# EAGLE board tiny-usb-panel (EAGLE 6.5.0)
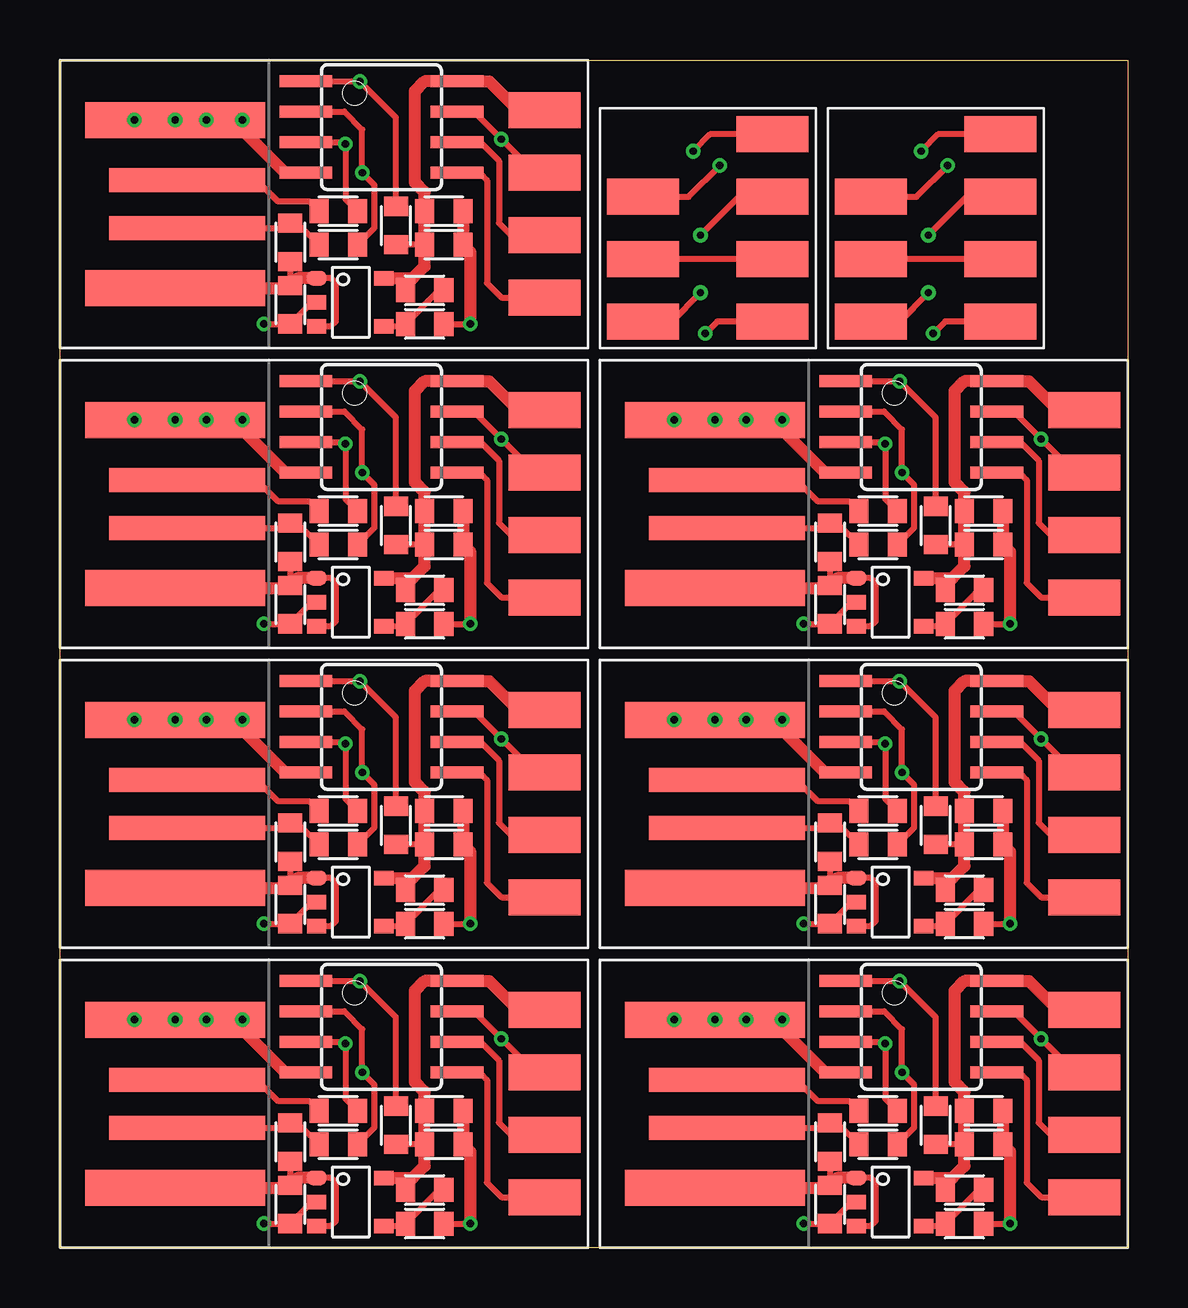
[diagram p0: board, top side]
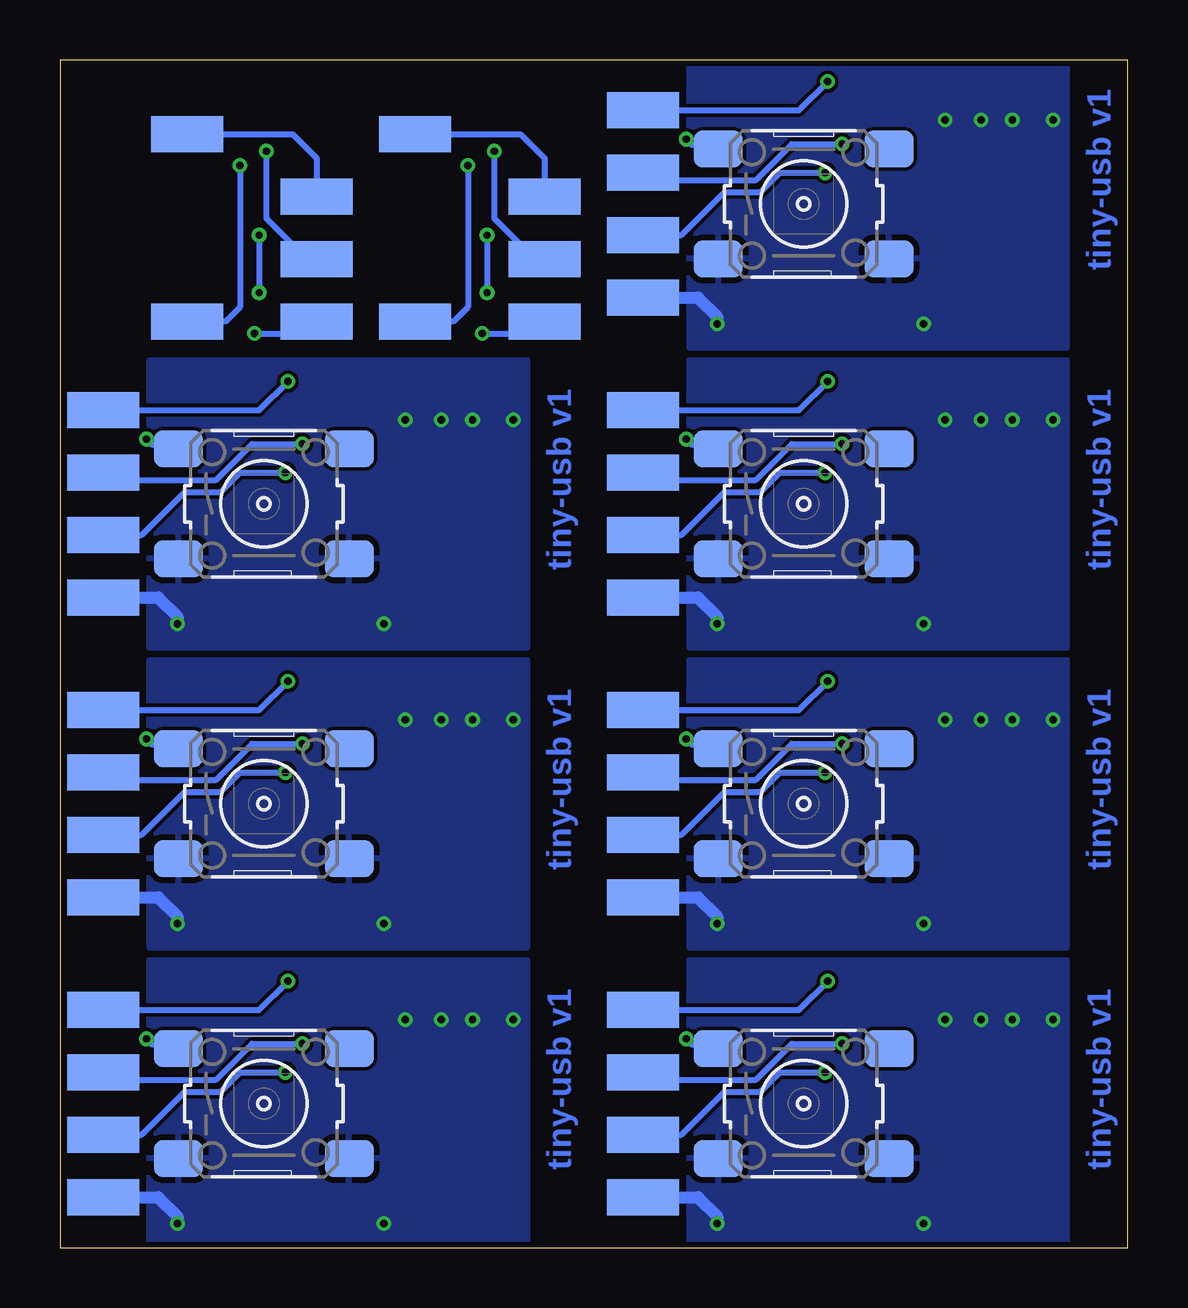
[diagram p1: board, bottom side, seen from below]

Size 44.5 x 49.5 mm. Coordinates in mm from the lower left corner, seen from the top.
Outline: 0,0 0,49.5 44.5,49.5 44.5,0 0,0
Copper layers (1*16): Top 0.035mm / dielectric 1.5mm / Bottom 0.035mm
Design rules "SeeedStudio_DRU-2layer_no_angle_20130527": minimum track width 6mil, minimum drill 12mil, track to track 6mil, track to pad 6mil, pad to pad 6mil, via to via 6mil, smd to smd 0mil, copper to edge 10mil, drill to drill 10mil, minimum pad ring 10mil, minimum via ring 6mil, stop-mask expansion 2mil, vias tented up to drill 25mil, thermal gap 10mil

## Footprints (pad centres in the part's own frame; a part is rotated, then mirrored left to right if it is on the bottom)
PAD_Q1.5X3MM = smd 3 x 1.5: 1 0,0
0603MIL = smd 0.8 x 1: 1 -0.8,0; 2 0.8,0
SOIC8 = smd 0.5 x 2.2: 1 -1.905,-3.154; 2 -0.645,-3.154; 3 0.625,-3.154; 4 1.895,-3.154; 5 1.905,3.154; 6 0.635,3.154; 7 -0.635,3.154; 8 -1.905,3.154
SOT23-5 = smd 0.8 x 0.6: 1 -1.4,1; 2 -1.4,0; 3 -1.4,-1; 4 1.4,-1; 5 1.4,1
B3F-10SMD = smd 2.032 x 1.524: 1 -3.556,2.286; 2 3.556,2.286; 3 -3.556,-2.286; 4 3.556,-2.286
USB-A-PCB = smd 7.5 x 1.5: 5V -0.2,-3.5; GND -0.2,3.5 | smd 6.5 x 1: USB_M 0.3,-1; USB_P 0.3,1

## Placement (x,y rotation side)
!RSTI_1  TP_Q3X1.5MM  [PAD_Q1.5X3MM]  33.8,43.8 180 top
!RSTI_5  TP_Q3X1.5MM  [PAD_Q1.5X3MM]  24.3,43.8 180 top
!RSTO  TP_Q3X1.5MM  [PAD_Q1.5X3MM]  29.7,38.6 180 bottom
!RSTO1  TP_Q3X1.5MM  [PAD_Q1.5X3MM]  39.2,38.6 180 bottom
C1  1u  [0603MIL]  16,4.3 0 top
C2  100n  [0603MIL]  16,5.7 0 top
C3  1u  [0603MIL]  9.6,1.8 270 top
C4  1u  [0603MIL]  16,16.8 0 top
C5  100n  [0603MIL]  16,18.2 0 top
C6  1u  [0603MIL]  9.6,14.3 270 top
C7  1u  [0603MIL]  16,29.3 0 top
C8  100n  [0603MIL]  16,30.7 0 top
C9  1u  [0603MIL]  9.6,26.8 270 top
C10  1u  [0603MIL]  16,41.8 0 top
C11  100n  [0603MIL]  16,43.2 0 top
C12  1u  [0603MIL]  9.6,39.3 270 top
C13  1u  [0603MIL]  38.5,4.3 0 top
C14  100n  [0603MIL]  38.5,5.7 0 top
C15  1u  [0603MIL]  32.1,1.8 270 top
C16  1u  [0603MIL]  38.5,16.8 0 top
C17  100n  [0603MIL]  38.5,18.2 0 top
C18  1u  [0603MIL]  32.1,14.3 270 top
C19  1u  [0603MIL]  38.5,29.3 0 top
C20  100n  [0603MIL]  38.5,30.7 0 top
C21  1u  [0603MIL]  32.1,26.8 270 top
GND  TP_Q3X1.5MM  [PAD_Q1.5X3MM]  20.2,2.1 0 bottom
GND1  TP_Q3X1.5MM  [PAD_Q1.5X3MM]  20.2,14.6 0 bottom
GND2  TP_Q3X1.5MM  [PAD_Q1.5X3MM]  20.2,27.1 0 bottom
GND3  TP_Q3X1.5MM  [PAD_Q1.5X3MM]  20.2,39.6 0 bottom
GND4  TP_Q3X1.5MM  [PAD_Q1.5X3MM]  42.7,2.1 0 bottom
GND5  TP_Q3X1.5MM  [PAD_Q1.5X3MM]  42.7,14.6 0 bottom
GND6  TP_Q3X1.5MM  [PAD_Q1.5X3MM]  42.7,27.1 0 bottom
GNDI_1  TP_Q3X1.5MM  [PAD_Q1.5X3MM]  33.8,43.8 180 bottom
GNDI_6  TP_Q3X1.5MM  [PAD_Q1.5X3MM]  24.3,43.8 180 bottom
GNDO  TP_Q3X1.5MM  [PAD_Q1.5X3MM]  29.7,46.4 180 bottom
GNDO1  TP_Q3X1.5MM  [PAD_Q1.5X3MM]  39.2,46.4 180 bottom
IC1  TINY85-20SU  [SOIC8]  13.4,9.2 270 top
IC2  SP6201EM5-L  [SOT23-5]  12.1,1.9 0 top
IC3  TINY85-20SU  [SOIC8]  13.4,21.7 270 top
IC4  SP6201EM5-L  [SOT23-5]  12.1,14.4 0 top
IC5  TINY85-20SU  [SOIC8]  13.4,34.2 270 top
IC6  SP6201EM5-L  [SOT23-5]  12.1,26.9 0 top
IC7  TINY85-20SU  [SOIC8]  13.4,46.7 270 top
IC8  SP6201EM5-L  [SOT23-5]  12.1,39.4 0 top
IC9  TINY85-20SU  [SOIC8]  35.9,9.2 270 top
IC10  SP6201EM5-L  [SOT23-5]  34.6,1.9 0 top
IC11  TINY85-20SU  [SOIC8]  35.9,21.7 270 top
IC12  SP6201EM5-L  [SOT23-5]  34.6,14.4 0 top
IC13  TINY85-20SU  [SOIC8]  35.9,34.2 270 top
IC14  SP6201EM5-L  [SOT23-5]  34.6,26.9 0 top
MISOI_1  TP_Q3X1.5MM  [PAD_Q1.5X3MM]  24.3,38.6 180 top
MISOI_2  TP_Q3X1.5MM  [PAD_Q1.5X3MM]  33.8,38.6 180 top
MISOO  TP_Q3X1.5MM  [PAD_Q1.5X3MM]  29.7,43.8 180 top
MISOO1  TP_Q3X1.5MM  [PAD_Q1.5X3MM]  39.2,43.8 180 top
MOSII_1  TP_Q3X1.5MM  [PAD_Q1.5X3MM]  33.8,41.2 180 bottom
MOSII_4  TP_Q3X1.5MM  [PAD_Q1.5X3MM]  24.3,41.2 180 bottom
MOSIO  TP_Q3X1.5MM  [PAD_Q1.5X3MM]  29.7,46.4 180 top
MOSIO1  TP_Q3X1.5MM  [PAD_Q1.5X3MM]  39.2,46.4 180 top
PB0  TP_Q3X1.5MM  [PAD_Q1.5X3MM]  20.2,2.1 0 top
PB1  TP_Q3X1.5MM  [PAD_Q1.5X3MM]  20.2,4.7 0 top
PB2  TP_Q3X1.5MM  [PAD_Q1.5X3MM]  20.2,7.3 0 top
PB3  TP_Q3X1.5MM  [PAD_Q1.5X3MM]  20.2,4.7 0 bottom
PB4  TP_Q3X1.5MM  [PAD_Q1.5X3MM]  20.2,7.3 0 bottom
PB5  TP_Q3X1.5MM  [PAD_Q1.5X3MM]  20.2,9.9 0 bottom
PB6  TP_Q3X1.5MM  [PAD_Q1.5X3MM]  20.2,22.4 0 bottom
PB7  TP_Q3X1.5MM  [PAD_Q1.5X3MM]  20.2,19.8 0 bottom
PB8  TP_Q3X1.5MM  [PAD_Q1.5X3MM]  20.2,17.2 0 bottom
PB9  TP_Q3X1.5MM  [PAD_Q1.5X3MM]  20.2,19.8 0 top
PB10  TP_Q3X1.5MM  [PAD_Q1.5X3MM]  20.2,17.2 0 top
PB11  TP_Q3X1.5MM  [PAD_Q1.5X3MM]  20.2,14.6 0 top
PB12  TP_Q3X1.5MM  [PAD_Q1.5X3MM]  20.2,34.9 0 bottom
PB13  TP_Q3X1.5MM  [PAD_Q1.5X3MM]  20.2,32.3 0 bottom
PB14  TP_Q3X1.5MM  [PAD_Q1.5X3MM]  20.2,29.7 0 bottom
PB15  TP_Q3X1.5MM  [PAD_Q1.5X3MM]  20.2,32.3 0 top
PB16  TP_Q3X1.5MM  [PAD_Q1.5X3MM]  20.2,29.7 0 top
PB17  TP_Q3X1.5MM  [PAD_Q1.5X3MM]  20.2,27.1 0 top
PB18  TP_Q3X1.5MM  [PAD_Q1.5X3MM]  20.2,47.4 0 bottom
PB19  TP_Q3X1.5MM  [PAD_Q1.5X3MM]  20.2,44.8 0 bottom
PB20  TP_Q3X1.5MM  [PAD_Q1.5X3MM]  20.2,42.2 0 bottom
PB21  TP_Q3X1.5MM  [PAD_Q1.5X3MM]  20.2,44.8 0 top
PB22  TP_Q3X1.5MM  [PAD_Q1.5X3MM]  20.2,42.2 0 top
PB23  TP_Q3X1.5MM  [PAD_Q1.5X3MM]  20.2,39.6 0 top
PB24  TP_Q3X1.5MM  [PAD_Q1.5X3MM]  42.7,9.9 0 bottom
PB25  TP_Q3X1.5MM  [PAD_Q1.5X3MM]  42.7,7.3 0 bottom
PB26  TP_Q3X1.5MM  [PAD_Q1.5X3MM]  42.7,4.7 0 bottom
PB27  TP_Q3X1.5MM  [PAD_Q1.5X3MM]  42.7,7.3 0 top
PB28  TP_Q3X1.5MM  [PAD_Q1.5X3MM]  42.7,4.7 0 top
PB29  TP_Q3X1.5MM  [PAD_Q1.5X3MM]  42.7,2.1 0 top
PB30  TP_Q3X1.5MM  [PAD_Q1.5X3MM]  42.7,22.4 0 bottom
PB31  TP_Q3X1.5MM  [PAD_Q1.5X3MM]  42.7,19.8 0 bottom
PB32  TP_Q3X1.5MM  [PAD_Q1.5X3MM]  42.7,17.2 0 bottom
PB33  TP_Q3X1.5MM  [PAD_Q1.5X3MM]  42.7,19.8 0 top
PB34  TP_Q3X1.5MM  [PAD_Q1.5X3MM]  42.7,17.2 0 top
PB35  TP_Q3X1.5MM  [PAD_Q1.5X3MM]  42.7,14.6 0 top
PB36  TP_Q3X1.5MM  [PAD_Q1.5X3MM]  42.7,34.9 0 bottom
PB37  TP_Q3X1.5MM  [PAD_Q1.5X3MM]  42.7,32.3 0 bottom
PB38  TP_Q3X1.5MM  [PAD_Q1.5X3MM]  42.7,29.7 0 bottom
PB39  TP_Q3X1.5MM  [PAD_Q1.5X3MM]  42.7,32.3 0 top
PB40  TP_Q3X1.5MM  [PAD_Q1.5X3MM]  42.7,29.7 0 top
PB41  TP_Q3X1.5MM  [PAD_Q1.5X3MM]  42.7,27.1 0 top
R1  68R  [0603MIL]  11.6,5.7 180 top
R2  68R  [0603MIL]  11.6,4.3 180 top
R3  1k5  [0603MIL]  9.6,4.4 270 top
R4  10k  [0603MIL]  14,5.1 270 top
R5  68R  [0603MIL]  15.2,2.4 0 top
R6  68R  [0603MIL]  15.2,1 0 top
R7  68R  [0603MIL]  11.6,18.2 180 top
R8  1k5  [0603MIL]  9.6,16.9 270 top
R9  68R  [0603MIL]  11.6,16.8 180 top
R10  10k  [0603MIL]  14,17.6 270 top
R11  68R  [0603MIL]  15.2,14.9 0 top
R12  68R  [0603MIL]  15.2,13.5 0 top
R13  68R  [0603MIL]  11.6,30.7 180 top
R14  1k5  [0603MIL]  9.6,29.4 270 top
R15  68R  [0603MIL]  11.6,29.3 180 top
R16  10k  [0603MIL]  14,30.1 270 top
R17  68R  [0603MIL]  15.2,27.4 0 top
R18  68R  [0603MIL]  15.2,26 0 top
R19  68R  [0603MIL]  11.6,43.2 180 top
R20  1k5  [0603MIL]  9.6,41.9 270 top
R21  68R  [0603MIL]  11.6,41.8 180 top
R22  10k  [0603MIL]  14,42.6 270 top
R23  68R  [0603MIL]  15.2,39.9 0 top
R24  68R  [0603MIL]  15.2,38.5 0 top
R25  68R  [0603MIL]  34.1,5.7 180 top
R26  1k5  [0603MIL]  32.1,4.4 270 top
R27  68R  [0603MIL]  34.1,4.3 180 top
R28  10k  [0603MIL]  36.5,5.1 270 top
R29  68R  [0603MIL]  37.7,2.4 0 top
R30  68R  [0603MIL]  37.7,1 0 top
R31  68R  [0603MIL]  34.1,18.2 180 top
R32  1k5  [0603MIL]  32.1,16.9 270 top
R33  68R  [0603MIL]  34.1,16.8 180 top
R34  10k  [0603MIL]  36.5,17.6 270 top
R35  68R  [0603MIL]  37.7,14.9 0 top
R36  68R  [0603MIL]  37.7,13.5 0 top
R37  68R  [0603MIL]  34.1,30.7 180 top
R38  1k5  [0603MIL]  32.1,29.4 270 top
R39  68R  [0603MIL]  34.1,29.3 180 top
R40  10k  [0603MIL]  36.5,30.1 270 top
R41  68R  [0603MIL]  37.7,27.4 0 top
R42  68R  [0603MIL]  37.7,26 0 top
S1  B3F-1000  [B3F-10SMD]  13.5,6 0 bottom
S2  B3F-1000  [B3F-10SMD]  13.5,18.5 0 bottom
S3  B3F-1000  [B3F-10SMD]  13.5,31 0 bottom
S4  B3F-1000  [B3F-10SMD]  13.5,43.5 0 bottom
S5  B3F-1000  [B3F-10SMD]  36,6 0 bottom
S6  B3F-1000  [B3F-10SMD]  36,18.5 0 bottom
S7  B3F-1000  [B3F-10SMD]  36,31 0 bottom
SCKI_1  TP_Q3X1.5MM  [PAD_Q1.5X3MM]  33.8,41.2 180 top
SCKI_3  TP_Q3X1.5MM  [PAD_Q1.5X3MM]  24.3,41.2 180 top
SCKO  TP_Q3X1.5MM  [PAD_Q1.5X3MM]  29.7,41.2 180 top
SCKO1  TP_Q3X1.5MM  [PAD_Q1.5X3MM]  39.2,41.2 180 top
VCC  TP_Q3X1.5MM  [PAD_Q1.5X3MM]  20.2,9.9 0 top
VCC1  TP_Q3X1.5MM  [PAD_Q1.5X3MM]  20.2,22.4 0 top
VCC2  TP_Q3X1.5MM  [PAD_Q1.5X3MM]  20.2,34.9 0 top
VCC3  TP_Q3X1.5MM  [PAD_Q1.5X3MM]  20.2,47.4 0 top
VCC4  TP_Q3X1.5MM  [PAD_Q1.5X3MM]  42.7,9.9 0 top
VCC5  TP_Q3X1.5MM  [PAD_Q1.5X3MM]  42.7,22.4 0 top
VCC6  TP_Q3X1.5MM  [PAD_Q1.5X3MM]  42.7,34.9 0 top
VCCI_1  TP_Q3X1.5MM  [PAD_Q1.5X3MM]  33.8,38.6 180 bottom
VCCI_2  TP_Q3X1.5MM  [PAD_Q1.5X3MM]  24.3,38.6 180 bottom
VCCO  TP_Q3X1.5MM  [PAD_Q1.5X3MM]  29.7,38.6 180 top
VCCO1  TP_Q3X1.5MM  [PAD_Q1.5X3MM]  39.2,38.6 180 top
X1  USBPCB  [USB-A-PCB]  5,6 0 top
X2  USBPCB  [USB-A-PCB]  5,18.5 0 top
X3  USBPCB  [USB-A-PCB]  5,31 0 top
X4  USBPCB  [USB-A-PCB]  5,43.5 0 top
X5  USBPCB  [USB-A-PCB]  27.5,6 0 top
X6  USBPCB  [USB-A-PCB]  27.5,18.5 0 top
X7  USBPCB  [USB-A-PCB]  27.5,31 0 top

## Library data of the parts
!RSTI_1 !RSTI_5 !RSTO !RSTO1 C1-C21 GND GND1-GND6 GNDI_1 GNDI_6 GNDO GNDO1 IC2 IC4 IC6 IC8 IC10 IC12 IC14 MISOI_1 MISOI_2 MISOO MISOO1 MOSII_1 MOSII_4 MOSIO MOSIO1 PB0 PB1-PB41 R1-R42 S1-S7 SCKI_1 SCKI_3 SCKO SCKO1 VCC VCC1-VCC6 VCCI_1 VCCI_2 VCCO VCCO1 = tiny
IC1 IC3 IC5 IC7 IC9 IC11 IC13 = avr-5
X1-X7 = sparkfun

## Nets
!ISP_RST: !RSTI_5.1 !RSTO.1
!ISP_RST1: !RSTI_1.1 !RSTO1.1
D+: R1.2 X1.USB_P
D+1: R7.2 X2.USB_P
D+2: R13.2 X3.USB_P
D+3: R19.2 X4.USB_P
D+4: R25.2 X5.USB_P
D+5: R31.2 X6.USB_P
D+6: R37.2 X7.USB_P
D-: R2.2 R3.1 X1.USB_M
D-1: R8.1 R9.2 X2.USB_M
D-2: R14.1 R15.2 X3.USB_M
D-3: R20.1 R21.2 X4.USB_M
D-4: R26.1 R27.2 X5.USB_M
D-5: R32.1 R33.2 X6.USB_M
D-6: R38.1 R39.2 X7.USB_M
GND: C1.2 C2.2 C3.2 GND.1 IC1.4 IC2.2 R6.2 S1.3 S1.4 X1.GND
GND1: C4.2 C5.2 C6.2 GND1.1 IC3.4 IC4.2 R12.2 S2.3 S2.4 X2.GND
GND2: C7.2 C8.2 C9.2 GND2.1 IC5.4 IC6.2 R18.2 S3.3 S3.4 X3.GND
GND3: C10.2 C11.2 C12.2 GND3.1 IC7.4 IC8.2 R24.2 S4.3 S4.4 X4.GND
GND8: C13.2 C14.2 C15.2 GND4.1 IC9.4 IC10.2 R30.2 S5.3 S5.4 X5.GND
GND9: C16.2 C17.2 C18.2 GND5.1 IC11.4 IC12.2 R36.2 S6.3 S6.4 X6.GND
GND10: C19.2 C20.2 C21.2 GND6.1 IC13.4 IC14.2 R42.2 S7.3 S7.4 X7.GND
ISP_GND: GNDI_6.1 GNDO.1
ISP_GND1: GNDI_1.1 GNDO1.1
ISP_MISO: MISOI_1.1 MISOO.1
ISP_MISO1: MISOI_2.1 MISOO1.1
ISP_MOSI: MOSII_4.1 MOSIO.1
ISP_MOSI1: MOSII_1.1 MOSIO1.1
ISP_SCK: SCKI_3.1 SCKO.1
ISP_SCK1: SCKI_1.1 SCKO1.1
ISP_VCC: VCCI_2.1 VCCO.1
ISP_VCC1: VCCI_1.1 VCCO1.1
N$1: IC2.4 R5.2 R6.1
N$2: IC4.4 R11.2 R12.1
N$3: IC6.4 R17.2 R18.1
N$4: IC8.4 R23.2 R24.1
N$5: IC10.4 R29.2 R30.1
N$6: IC12.4 R35.2 R36.1
N$7: IC14.4 R41.2 R42.1
PB0: IC1.5 PB0.1
PB1: IC1.6 PB1.1
PB2: IC1.7 PB2.1 S1.1
PB3: IC1.2 PB3.1 R2.1
PB4: IC1.3 PB4.1 R1.1
PB5: IC1.1 PB5.1 R4.1
PB6: IC3.6 PB10.1
PB7: IC3.7 PB9.1 S2.1
PB8: IC3.5 PB11.1
PB9: IC3.2 PB8.1 R9.1
PB10: IC3.3 PB7.1 R7.1
PB11: IC3.1 PB6.1 R10.1
PB12: IC5.6 PB16.1
PB13: IC5.7 PB15.1 S3.1
PB14: IC5.5 PB17.1
PB15: IC5.2 PB14.1 R15.1
PB16: IC5.3 PB13.1 R13.1
PB17: IC5.1 PB12.1 R16.1
PB18: IC7.6 PB22.1
PB19: IC7.7 PB21.1 S4.1
PB20: IC7.5 PB23.1
PB21: IC7.2 PB20.1 R21.1
PB22: IC7.3 PB19.1 R19.1
PB23: IC7.1 PB18.1 R22.1
PB24: IC9.6 PB28.1
PB25: IC9.7 PB27.1 S5.1
PB26: IC9.5 PB29.1
PB27: IC9.2 PB26.1 R27.1
PB28: IC9.3 PB25.1 R25.1
PB29: IC9.1 PB24.1 R28.1
PB30: IC11.6 PB34.1
PB31: IC11.7 PB33.1 S6.1
PB32: IC11.5 PB35.1
PB33: IC11.2 PB32.1 R33.1
PB34: IC11.3 PB31.1 R31.1
PB35: IC11.1 PB30.1 R34.1
PB36: IC13.6 PB40.1
PB37: IC13.7 PB39.1 S7.1
PB38: IC13.5 PB41.1
PB39: IC13.2 PB38.1 R39.1
PB40: IC13.3 PB37.1 R37.1
PB41: IC13.1 PB36.1 R40.1
VBUS: C3.1 IC2.1 IC2.3 R3.2 X1.5V
VBUS1: C6.1 IC4.1 IC4.3 R8.2 X2.5V
VBUS2: C9.1 IC6.1 IC6.3 R14.2 X3.5V
VBUS3: C12.1 IC8.1 IC8.3 R20.2 X4.5V
VBUS4: C15.1 IC10.1 IC10.3 R26.2 X5.5V
VBUS5: C18.1 IC12.1 IC12.3 R32.2 X6.5V
VBUS6: C21.1 IC14.1 IC14.3 R38.2 X7.5V
VCC: C1.1 C2.1 IC1.8 IC2.5 R4.2 R5.1 VCC.1
VCC1: C4.1 C5.1 IC3.8 IC4.5 R10.2 R11.1 VCC1.1
VCC2: C7.1 C8.1 IC5.8 IC6.5 R16.2 R17.1 VCC2.1
VCC3: C10.1 C11.1 IC7.8 IC8.5 R22.2 R23.1 VCC3.1
VCC4: C13.1 C14.1 IC9.8 IC10.5 R28.2 R29.1 VCC4.1
VCC5: C16.1 C17.1 IC11.8 IC12.5 R34.2 R35.1 VCC5.1
VCC6: C19.1 C20.1 IC13.8 IC14.5 R40.2 R41.1 VCC6.1

## Tracks (layer width: path | path; a pad name or v marks a point on that pad's centre or on a via)
!ISP_RST  (via drill 0.3)
  Top 0.25: !RSTI_5.1 26.2,43.8 v27.5,45.1
  Bottom 0.25: v27.5,45.1 27.5,39.2 28.1,38.6 !RSTO.1
!ISP_RST1  (via drill 0.3)
  Top 0.25: !RSTI_1.1 35.7,43.8 v37,45.1
  Bottom 0.25: v37,45.1 37,39.2 37.6,38.6 !RSTO1.1
D+
  Top 0.25: X1.USB_P 8.2,7 9.1,6.1 10.4,6.1 R1.2
D+1
  Top 0.25: X2.USB_P 8.2,19.5 9.1,18.6 10.4,18.6 R7.2
D+2
  Top 0.25: X3.USB_P 8.2,32 9.1,31.1 10.4,31.1 R13.2
D+3
  Top 0.25: X4.USB_P 8.2,44.5 9.1,43.6 10.4,43.6 R19.2
D+4
  Top 0.25: X5.USB_P 30.7,7 31.6,6.1 32.9,6.1 R25.2
D+5
  Top 0.25: X6.USB_P 30.7,19.5 31.6,18.6 32.9,18.6 R31.2
D+6
  Top 0.25: X7.USB_P 30.7,32 31.6,31.1 32.9,31.1 R37.2
D-
  Top 0.25: X1.USB_M 9.6,5 | 9.6,5 10.1,5 R2.2 | R3.1 9.6,5
D-1
  Top 0.25: X2.USB_M 9.6,17.5 | 9.6,17.5 10.1,17.5 R9.2 | R8.1 9.6,17.5
D-2
  Top 0.25: X3.USB_M 9.6,30 | 9.6,30 10.1,30 R15.2 | R14.1 9.6,30
D-3
  Top 0.25: X4.USB_M 9.6,42.5 | 9.6,42.5 10.1,42.5 R21.2 | R20.1 9.6,42.5
D-4
  Top 0.25: X5.USB_M 32.1,5 | 32.1,5 32.6,5 R27.2 | R26.1 32.1,5
D-5
  Top 0.25: X6.USB_M 32.1,17.5 | 32.1,17.5 32.6,17.5 R33.2 | R32.1 32.1,17.5
D-6
  Top 0.25: X7.USB_M 32.1,30 | 32.1,30 32.6,30 R39.2 | R38.1 32.1,30
GND  (via drill 0.3)
  Top 0.25: v8.5,1 C3.2 10.5,1.9 IC2.2 | R6.2 v17.1,1
  Top 0.5: C2.2 C1.2 17.1,4 v17.1,1 | IC1.4 9.39,7.3 7.2,9.5 v6.1,9.5
  Bottom 0.5: GND.1 17.9,2.1 17.1,1.3 v17.1,1
  other vias: 4.8,9.5 3.1,9.5 7.6,9.5
  pour Bottom: 2.5,12 18.3,12 18.3,0 2.5,0
GND1  (via drill 0.3)
  Top 0.25: v8.5,13.5 C6.2 10.5,14.4 IC4.2 | R12.2 v17.1,13.5
  Top 0.5: C5.2 C4.2 17.1,16.5 v17.1,13.5 | IC3.4 9.39,19.8 7.2,22 v6.1,22
  Bottom 0.5: GND1.1 17.9,14.6 17.1,13.8 v17.1,13.5
  other vias: 4.8,22 3.1,22 7.6,22
  pour Bottom: 2.5,24.5 18.3,24.5 18.3,12.5 2.5,12.5
GND2  (via drill 0.3)
  Top 0.25: v8.5,26 C9.2 10.5,26.9 IC6.2 | R18.2 v17.1,26
  Top 0.5: C8.2 C7.2 17.1,29 v17.1,26 | IC5.4 9.39,32.3 7.2,34.5 v6.1,34.5
  Bottom 0.5: GND2.1 17.9,27.1 17.1,26.3 v17.1,26
  other vias: 4.8,34.5 3.1,34.5 7.6,34.5
  pour Bottom: 2.5,37 18.3,37 18.3,25 2.5,25
GND3  (via drill 0.3)
  Top 0.25: v8.5,38.5 C12.2 10.5,39.4 IC8.2 | R24.2 v17.1,38.5
  Top 0.5: C11.2 C10.2 17.1,41.5 v17.1,38.5 | IC7.4 9.39,44.8 7.2,47 v6.1,47
  Bottom 0.5: GND3.1 17.9,39.6 17.1,38.8 v17.1,38.5
  other vias: 4.8,47 3.1,47 7.6,47
  pour Bottom: 2.5,49.5 18.3,49.5 18.3,37.5 2.5,37.5
GND8  (via drill 0.3)
  Top 0.25: v31,1 C15.2 33,1.9 IC10.2 | R30.2 v39.6,1
  Top 0.5: C14.2 C13.2 39.6,4 v39.6,1 | IC9.4 31.89,7.3 29.7,9.5 v28.6,9.5
  Bottom 0.5: GND4.1 40.4,2.1 39.6,1.3 v39.6,1
  other vias: 27.3,9.5 25.6,9.5 30.1,9.5
  pour Bottom: 25,12 40.8,12 40.8,0 25,0
GND9  (via drill 0.3)
  Top 0.25: v31,13.5 C18.2 33,14.4 IC12.2 | R36.2 v39.6,13.5
  Top 0.5: C17.2 C16.2 39.6,16.5 v39.6,13.5 | IC11.4 31.89,19.8 29.7,22 v28.6,22
  Bottom 0.5: GND5.1 40.4,14.6 39.6,13.8 v39.6,13.5
  other vias: 27.3,22 25.6,22 30.1,22
  pour Bottom: 25,24.5 40.8,24.5 40.8,12.5 25,12.5
GND10  (via drill 0.3)
  Top 0.25: v31,26 C21.2 33,26.9 IC14.2 | R42.2 v39.6,26
  Top 0.5: C20.2 C19.2 39.6,29 v39.6,26 | IC13.4 31.89,32.3 29.7,34.5 v28.6,34.5
  Bottom 0.5: GND6.1 40.4,27.1 39.6,26.3 v39.6,26
  other vias: 27.3,34.5 25.6,34.5 30.1,34.5
  pour Bottom: 25,37 40.8,37 40.8,25 25,25
ISP_GND
  Bottom 0.25: GNDO.1 25.3,46.4 24.3,45.4 GNDI_6.1
ISP_GND1
  Bottom 0.25: GNDO1.1 34.8,46.4 33.8,45.4 GNDI_1.1
ISP_MISO  (via drill 0.3)
  Top 0.25: MISOO.1 28.3,43.8 v26.7,42.2 | v26.7,39.8 25.5,38.6 MISOI_1.1
  Bottom 0.25: v26.7,42.2 v26.7,39.8
ISP_MISO1  (via drill 0.3)
  Top 0.25: MISOO1.1 37.8,43.8 v36.2,42.2 | v36.2,39.8 35,38.6 MISOI_2.1
  Bottom 0.25: v36.2,42.2 v36.2,39.8
ISP_MOSI  (via drill 0.3)
  Top 0.25: MOSIO.1 27.1,46.4 v26.4,45.7
  Bottom 0.25: v26.4,45.7 26.4,42.9 24.7,41.2 MOSII_4.1
ISP_MOSI1  (via drill 0.3)
  Top 0.25: MOSIO1.1 36.6,46.4 v35.9,45.7
  Bottom 0.25: v35.9,45.7 35.9,42.9 34.2,41.2 MOSII_1.1
ISP_SCK
  Top 0.25: SCKO.1 SCKI_3.1
ISP_SCK1
  Top 0.25: SCKO1.1 SCKI_1.1
ISP_VCC  (via drill 0.3)
  Top 0.25: VCCO.1 27.4,38.6 v26.9,38.1
  Bottom 0.25: v26.9,38.1 24.8,38.1 VCCI_2.1
ISP_VCC1  (via drill 0.3)
  Top 0.25: VCCO1.1 36.9,38.6 v36.4,38.1
  Bottom 0.25: v36.4,38.1 34.3,38.1 VCCI_1.1
N$1
  Top 0.25: IC2.4 14.3,0.9 R6.1 15.8,2.4 R5.2
N$2
  Top 0.25: IC4.4 14.3,13.4 R12.1 15.8,14.9 R11.2
N$3
  Top 0.25: IC6.4 14.3,25.9 R18.1 15.8,27.4 R17.2
N$4
  Top 0.25: IC8.4 14.3,38.4 R24.1 15.8,39.9 R23.2
N$5
  Top 0.25: IC10.4 36.8,0.9 R30.1 38.3,2.4 R29.2
N$6
  Top 0.25: IC12.4 36.8,13.4 R36.1 38.3,14.9 R35.2
N$7
  Top 0.25: IC14.4 36.8,25.9 R42.1 38.3,27.4 R41.2
PB0
  Top 0.25: PB0.1 18.4,2.1 17.8,2.7 17.8,7 17.5,7.29 IC1.5
PB1
  Top 0.25: PB1.1 18.8,4.7 18.3,5.2 18.3,7.8 17.54,8.56 IC1.6
PB2  (via drill 0.3)
  Top 0.25: IC1.7 17.36,9.84 17.36,9.73 v18.4,8.7 19.8,7.3 PB2.1
  Bottom 0.25: S1.1 17.06,8.46 18.16,8.46 v18.4,8.7
PB3  (via drill 0.3)
  Top 0.25: IC1.2 11.86,9.85 12.6,9.1 v12.6,7.3 13.1,6.8 13.1,5 R2.1
  Bottom 0.25: PB3.1 18.6,4.7 16.8,6.5 15.3,6.5 14.5,7.3 v12.6,7.3
PB4  (via drill 0.3)
  Top 0.25: IC1.3 11.82,8.57 v11.9,8.5 11.9,6.2 R1.1
  Bottom 0.25: PB4.1 19.2,7.3 18.9,7 15.5,7 14,8.5 v11.9,8.5
PB5  (via drill 0.3)
  Top 0.25: IC1.1 v12.5,11.1 14,9.6 R4.1
  Bottom 0.25: v12.5,11.11 v12.5,11.1 13.7,9.9 PB5.1
PB6
  Top 0.25: PB10.1 18.8,17.2 18.3,17.7 18.3,20.3 17.54,21.07 IC3.6
PB7  (via drill 0.3)
  Top 0.25: IC3.7 17.36,22.34 17.36,22.23 v18.4,21.2 19.8,19.8 PB9.1
  Bottom 0.25: S2.1 17.06,20.96 18.16,20.96 v18.4,21.2
PB8
  Top 0.25: PB11.1 18.4,14.6 17.8,15.2 17.8,19.5 17.5,19.8 IC3.5
PB9  (via drill 0.3)
  Top 0.25: IC3.2 11.86,22.34 12.6,21.6 v12.6,19.8 13.1,19.3 13.1,17.5 R9.1
  Bottom 0.25: PB8.1 18.6,17.2 16.8,19 15.3,19 14.5,19.8 v12.6,19.8
PB10  (via drill 0.3)
  Top 0.25: IC3.3 11.82,21.07 v11.9,21 11.9,18.7 R7.1
  Bottom 0.25: PB7.1 19.2,19.8 18.9,19.5 15.5,19.5 14,21 v11.9,21
PB11  (via drill 0.3)
  Top 0.25: IC3.1 v12.5,23.6 14,22.1 R10.1
  Bottom 0.25: v12.5,23.61 v12.5,23.6 13.7,22.4 PB6.1
PB12
  Top 0.25: PB16.1 18.8,29.7 18.3,30.2 18.3,32.8 17.54,33.56 IC5.6
PB13  (via drill 0.3)
  Top 0.25: IC5.7 17.36,34.84 17.36,34.73 v18.4,33.7 19.8,32.3 PB15.1
  Bottom 0.25: S3.1 17.06,33.46 18.16,33.46 v18.4,33.7
PB14
  Top 0.25: PB17.1 18.4,27.1 17.8,27.7 17.8,32 17.5,32.3 IC5.5
PB15  (via drill 0.3)
  Top 0.25: IC5.2 11.86,34.84 12.6,34.1 v12.6,32.3 13.1,31.8 13.1,30 R15.1
  Bottom 0.25: PB14.1 18.6,29.7 16.8,31.5 15.3,31.5 14.5,32.3 v12.6,32.3
PB16  (via drill 0.3)
  Top 0.25: IC5.3 11.82,33.58 v11.9,33.5 11.9,31.2 R13.1
  Bottom 0.25: PB13.1 19.2,32.3 18.9,32 15.5,32 14,33.5 v11.9,33.5
PB17  (via drill 0.3)
  Top 0.25: IC5.1 v12.5,36.1 14,34.6 R16.1
  Bottom 0.25: v12.5,36.11 v12.5,36.1 13.7,34.9 PB12.1
PB18
  Top 0.25: PB22.1 18.8,42.2 18.3,42.7 18.3,45.3 17.54,46.06 IC7.6
PB19  (via drill 0.3)
  Top 0.25: IC7.7 17.36,47.34 17.36,47.23 v18.4,46.2 19.8,44.8 PB21.1
  Bottom 0.25: S4.1 17.06,45.96 18.16,45.96 v18.4,46.2
PB20
  Top 0.25: PB23.1 18.4,39.6 17.8,40.2 17.8,44.5 17.5,44.8 IC7.5
PB21  (via drill 0.3)
  Top 0.25: IC7.2 11.86,47.34 12.6,46.6 v12.6,44.8 13.1,44.3 13.1,42.5 R21.1
  Bottom 0.25: PB20.1 18.6,42.2 16.8,44 15.3,44 14.5,44.8 v12.6,44.8
PB22  (via drill 0.3)
  Top 0.25: IC7.3 11.82,46.08 v11.9,46 11.9,43.7 R19.1
  Bottom 0.25: PB19.1 19.2,44.8 18.9,44.5 15.5,44.5 14,46 v11.9,46
PB23  (via drill 0.3)
  Top 0.25: IC7.1 v12.5,48.6 14,47.1 R22.1
  Bottom 0.25: v12.5,48.61 v12.5,48.6 13.7,47.4 PB18.1
PB24
  Top 0.25: PB28.1 41.3,4.7 40.8,5.2 40.8,7.8 40.03,8.56 IC9.6
PB25  (via drill 0.3)
  Top 0.25: IC9.7 39.87,9.84 39.87,9.73 v40.9,8.7 42.3,7.3 PB27.1
  Bottom 0.25: S5.1 39.56,8.46 40.66,8.46 v40.9,8.7
PB26
  Top 0.25: PB29.1 40.9,2.1 40.3,2.7 40.3,7 40.01,7.29 IC9.5
PB27  (via drill 0.3)
  Top 0.25: IC9.2 34.35,9.85 35.1,9.1 v35.1,7.3 35.6,6.8 35.6,5 R27.1
  Bottom 0.25: PB26.1 41.1,4.7 39.3,6.5 37.8,6.5 37,7.3 v35.1,7.3
PB28  (via drill 0.3)
  Top 0.25: IC9.3 34.33,8.57 v34.4,8.5 34.4,6.2 R25.1
  Bottom 0.25: PB25.1 41.7,7.3 41.4,7 38,7 36.5,8.5 v34.4,8.5
PB29  (via drill 0.3)
  Top 0.25: IC9.1 v35,11.1 36.5,9.6 R28.1
  Bottom 0.25: v35,11.11 v35,11.1 36.2,9.9 PB24.1
PB30
  Top 0.25: PB34.1 41.3,17.2 40.8,17.7 40.8,20.3 40.03,21.07 IC11.6
PB31  (via drill 0.3)
  Top 0.25: IC11.7 39.87,22.34 39.87,22.23 v40.9,21.2 42.3,19.8 PB33.1
  Bottom 0.25: S6.1 39.56,20.96 40.66,20.96 v40.9,21.2
PB32
  Top 0.25: PB35.1 40.9,14.6 40.3,15.2 40.3,19.5 40.01,19.8 IC11.5
PB33  (via drill 0.3)
  Top 0.25: IC11.2 34.35,22.34 35.1,21.6 v35.1,19.8 35.6,19.3 35.6,17.5 R33.1
  Bottom 0.25: PB32.1 41.1,17.2 39.3,19 37.8,19 37,19.8 v35.1,19.8
PB34  (via drill 0.3)
  Top 0.25: IC11.3 34.33,21.07 v34.4,21 34.4,18.7 R31.1
  Bottom 0.25: PB31.1 41.7,19.8 41.4,19.5 38,19.5 36.5,21 v34.4,21
PB35  (via drill 0.3)
  Top 0.25: IC11.1 v35,23.6 36.5,22.1 R34.1
  Bottom 0.25: v35,23.61 v35,23.6 36.2,22.4 PB30.1
PB36
  Top 0.25: PB40.1 41.3,29.7 40.8,30.2 40.8,32.8 40.03,33.56 IC13.6
PB37  (via drill 0.3)
  Top 0.25: IC13.7 39.87,34.84 39.87,34.73 v40.9,33.7 42.3,32.3 PB39.1
  Bottom 0.25: S7.1 39.56,33.46 40.66,33.46 v40.9,33.7
PB38
  Top 0.25: PB41.1 40.9,27.1 40.3,27.7 40.3,32 40.01,32.3 IC13.5
PB39  (via drill 0.3)
  Top 0.25: IC13.2 34.35,34.84 35.1,34.1 v35.1,32.3 35.6,31.8 35.6,30 R39.1
  Bottom 0.25: PB38.1 41.1,29.7 39.3,31.5 37.8,31.5 37,32.3 v35.1,32.3
PB40  (via drill 0.3)
  Top 0.25: IC13.3 34.33,33.58 v34.4,33.5 34.4,31.2 R37.1
  Bottom 0.25: PB37.1 41.7,32.3 41.4,32 38,32 36.5,33.5 v34.4,33.5
PB41  (via drill 0.3)
  Top 0.25: IC13.1 v35,36.1 36.5,34.6 R40.1
  Bottom 0.25: v35,36.11 v35,36.1 36.2,34.9 PB36.1
VBUS
  Top 0.25: R3.2 C3.1 | IC2.3 11.3,0.9 11.5,1.1 11.5,2.7 11.3,2.9 IC2.1
  Top 0.5: X1.5V 9.6,2.5 C3.1 9.9,2.9 IC2.1
VBUS1
  Top 0.25: R8.2 C6.1 | IC4.3 11.3,13.4 11.5,13.6 11.5,15.2 11.3,15.4 IC4.1
  Top 0.5: X2.5V 9.6,15 C6.1 9.9,15.4 IC4.1
VBUS2
  Top 0.25: R14.2 C9.1 | IC6.3 11.3,25.9 11.5,26.1 11.5,27.7 11.3,27.9 IC6.1
  Top 0.5: X3.5V 9.6,27.5 C9.1 9.9,27.9 IC6.1
VBUS3
  Top 0.25: R20.2 C12.1 | IC8.3 11.3,38.4 11.5,38.6 11.5,40.2 11.3,40.4 IC8.1
  Top 0.5: X4.5V 9.6,40 C12.1 9.9,40.4 IC8.1
VBUS4
  Top 0.25: R26.2 C15.1 | IC10.3 33.8,0.9 34,1.1 34,2.7 33.8,2.9 IC10.1
  Top 0.5: X5.5V 32.1,2.5 C15.1 32.4,2.9 IC10.1
VBUS5
  Top 0.25: R32.2 C18.1 | IC12.3 33.8,13.4 34,13.6 34,15.2 33.8,15.4 IC12.1
  Top 0.5: X6.5V 32.1,15 C18.1 32.4,15.4 IC12.1
VBUS6
  Top 0.25: R38.2 C21.1 | IC14.3 33.8,25.9 34,26.1 34,27.7 33.8,27.9 IC14.1
  Top 0.5: X7.5V 32.1,27.5 C21.1 32.4,27.9 IC14.1
VCC
  Top 0.25: IC1.8 | C1.1 R4.2 | R5.1 14.4,2.9
  Top 0.5: VCC.1 19.1,9.9 17.89,11.11 IC1.8 15.21,11.11 14.8,10.7 14.8,6.9 15.2,6.5 C2.1 C1.1 15.2,3.4 14.7,2.9 14.4,2.9 IC2.5
VCC1
  Top 0.25: IC3.8 | C4.1 R10.2 | R11.1 14.4,15.4
  Top 0.5: VCC1.1 19.1,22.4 17.89,23.61 IC3.8 15.21,23.61 14.8,23.2 14.8,19.4 15.2,19 C5.1 C4.1 15.2,15.9 14.7,15.4 14.4,15.4 IC4.5
VCC2
  Top 0.25: IC5.8 | C7.1 R16.2 | R17.1 14.4,27.9
  Top 0.5: VCC2.1 19.1,34.9 17.89,36.1 IC5.8 15.21,36.1 14.8,35.7 14.8,31.9 15.2,31.5 C8.1 C7.1 15.2,28.4 14.7,27.9 14.4,27.9 IC6.5
VCC3
  Top 0.25: IC7.8 | C10.1 R22.2 | R23.1 14.4,40.4
  Top 0.5: VCC3.1 19.1,47.4 17.89,48.6 IC7.8 15.21,48.6 14.8,48.2 14.8,44.4 15.2,44 C11.1 C10.1 15.2,40.9 14.7,40.4 14.4,40.4 IC8.5
VCC4
  Top 0.25: IC9.8 | C13.1 R28.2 | R29.1 36.9,2.9
  Top 0.5: VCC4.1 41.6,9.9 40.4,11.11 IC9.8 37.7,11.11 37.3,10.7 37.3,6.9 37.7,6.5 C14.1 C13.1 37.7,3.4 37.2,2.9 36.9,2.9 IC10.5
VCC5
  Top 0.25: IC11.8 | C16.1 R34.2 | R35.1 36.9,15.4
  Top 0.5: VCC5.1 41.6,22.4 40.4,23.61 IC11.8 37.7,23.61 37.3,23.2 37.3,19.4 37.7,19 C17.1 C16.1 37.7,15.9 37.2,15.4 36.9,15.4 IC12.5
VCC6
  Top 0.25: IC13.8 | C19.1 R40.2 | R41.1 36.9,27.9
  Top 0.5: VCC6.1 41.6,34.9 40.4,36.1 IC13.8 37.7,36.1 37.3,35.7 37.3,31.9 37.7,31.5 C20.1 C19.1 37.7,28.4 37.2,27.9 36.9,27.9 IC14.5

## Text on the board
Bottom: tiny-usb v1 | tiny-usb v1 | tiny-usb v1 | tiny-usb v1 | tiny-usb v1 | tiny-usb v1 | tiny-usb v1